# EAGLE board 4081 (EAGLE 5.06)
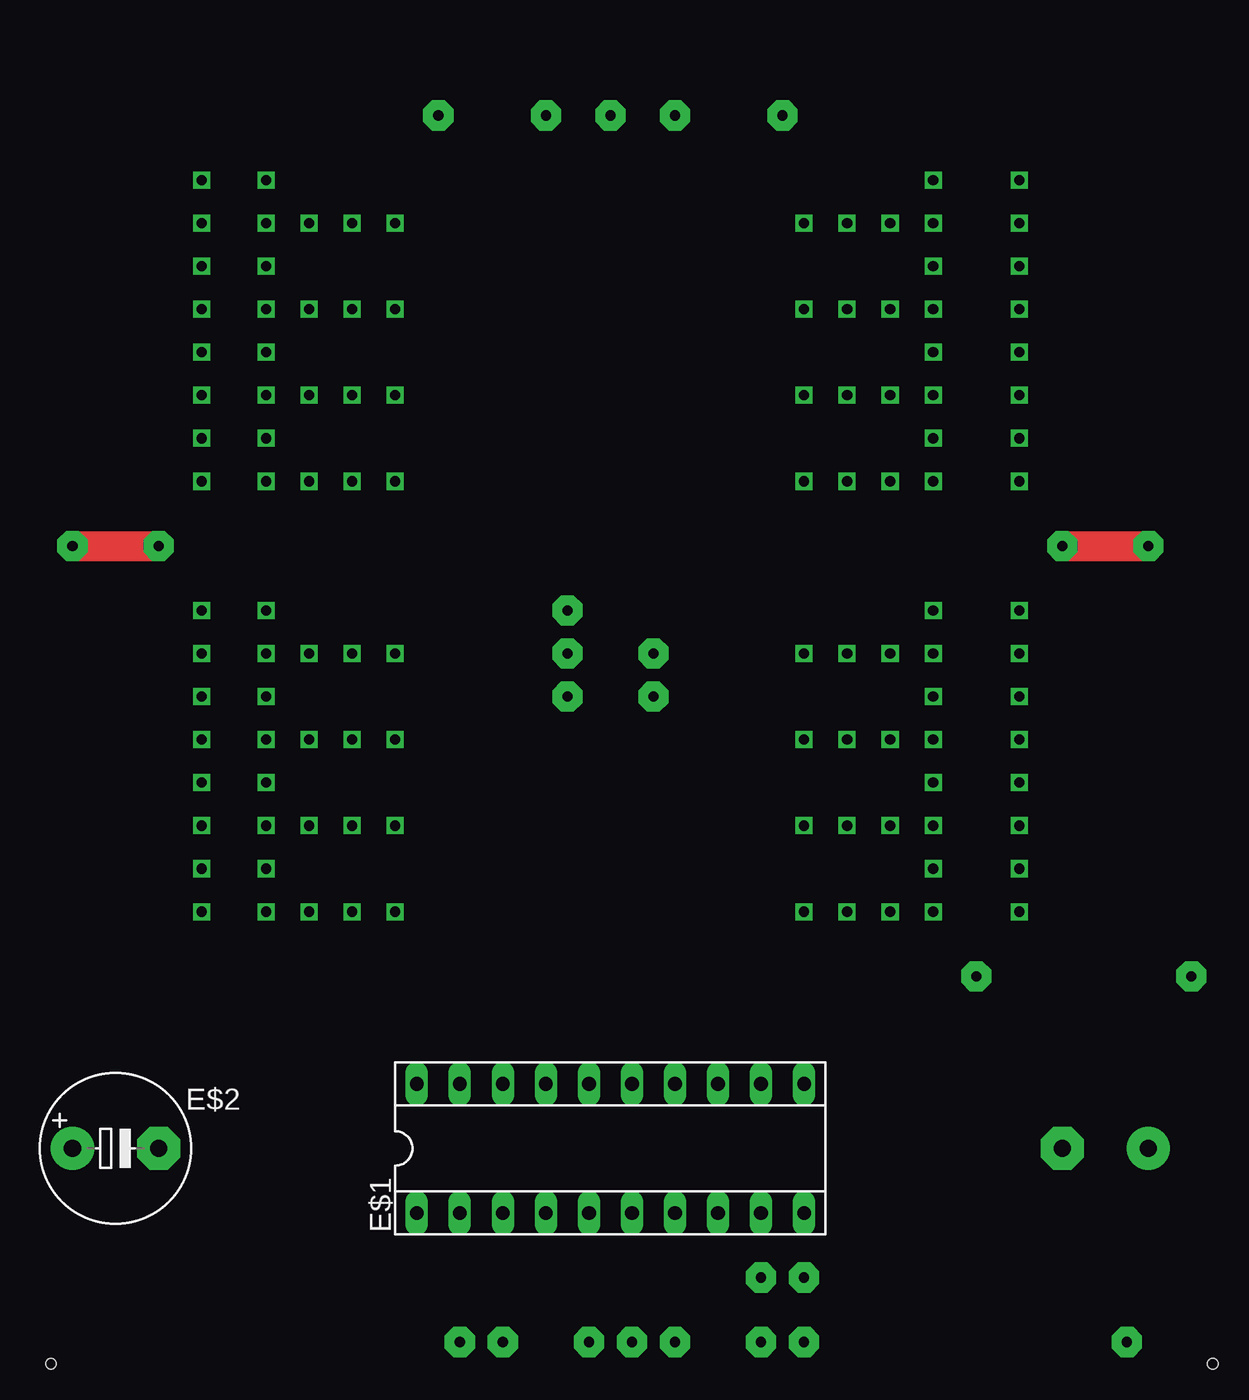
[diagram p0: board, top side]
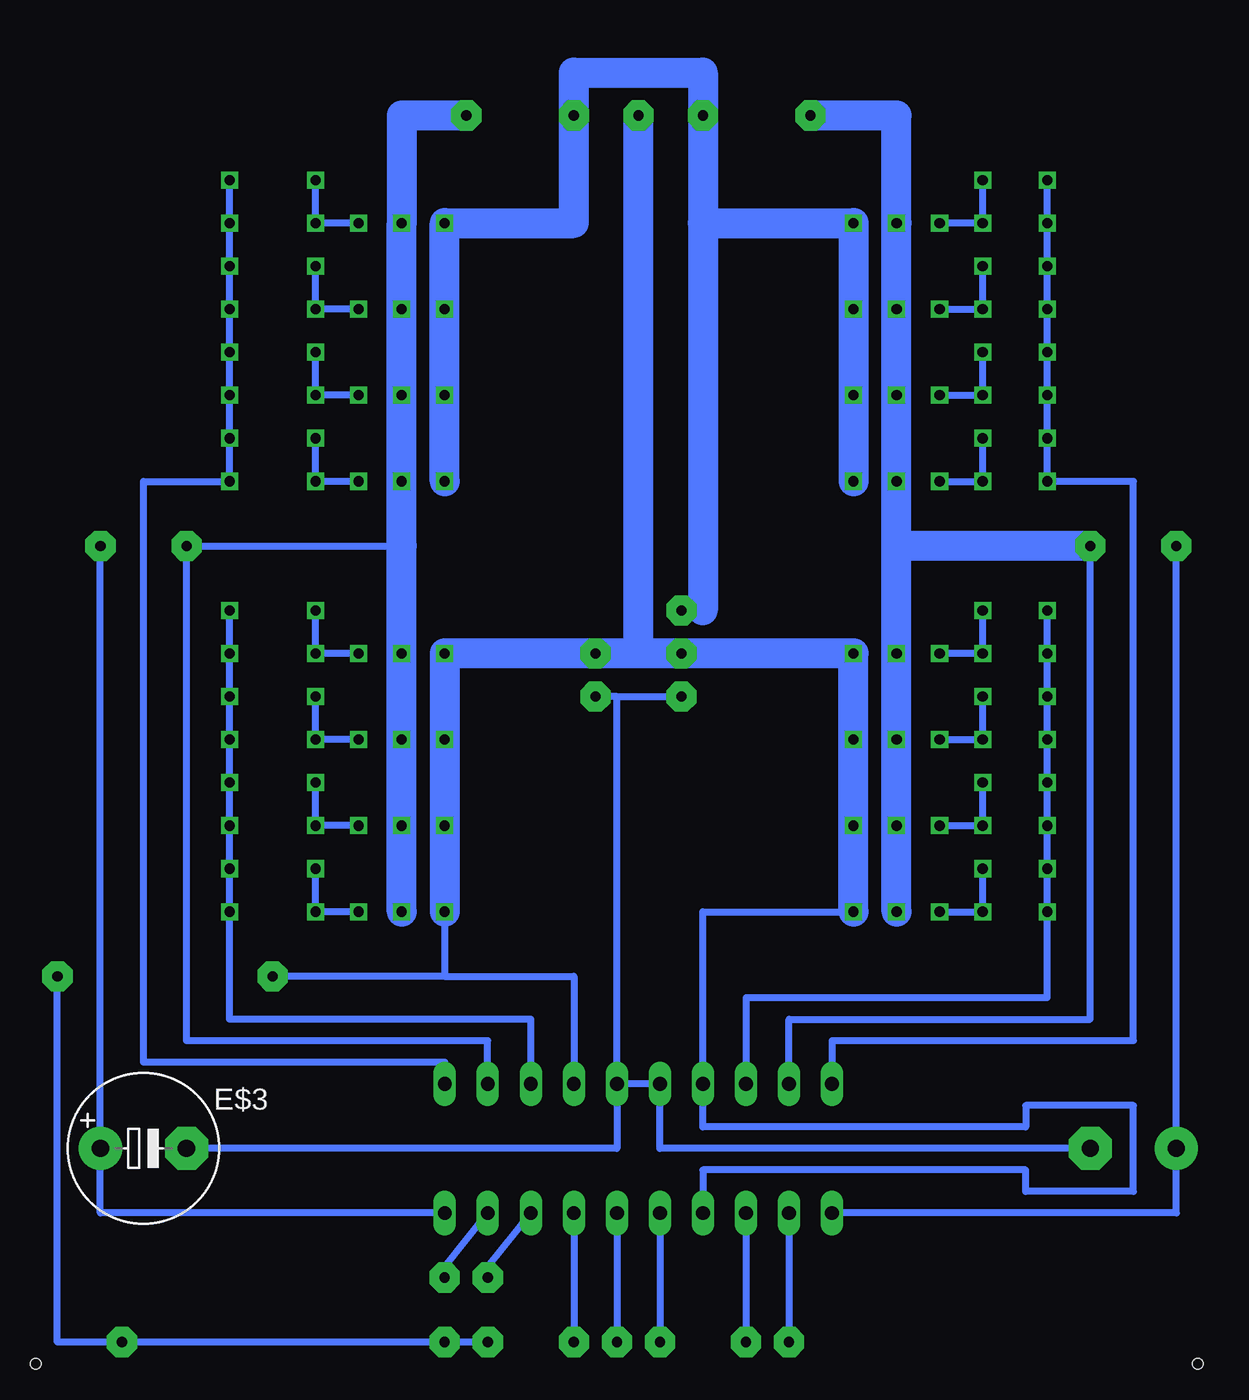
[diagram p1: board, bottom side, seen from below]

No outline drawn. Coordinates in mm, seen from the top.
Copper layers (1*16): Top 0.035mm / dielectric 1.5mm / Bottom 0.035mm
Design rules "default": minimum track width 10mil, minimum drill 24mil, track to track 8mil, track to pad 8mil, pad to pad 8mil, via to via 8mil, smd to smd 8mil, copper to edge 40mil, drill to drill 8mil, minimum pad ring 10mil, minimum via ring 8mil, stop-mask expansion 4mil, vias tented up to drill 0mil, thermal gap 10mil
Holes 0.6 mm at 0,0 68.58,0

## Footprints (pad centres in the part's own frame; a part is rotated, then mirrored left to right if it is on the bottom)
SOCKET-20 = drill 0.813 long: 1 -11.43,-3.81; 2 -8.89,-3.81; 3 -6.35,-3.81; 4 -3.81,-3.81; 5 -1.27,-3.81; 6 1.27,-3.81; 7 3.81,-3.81; 8 6.35,-3.81; 9 8.89,-3.81; 10 11.43,-3.81; 11 11.43,3.81; 12 8.89,3.81; 13 6.35,3.81; 14 3.81,3.81; 15 1.27,3.81; 16 -1.27,3.81; 17 -3.81,3.81; 18 -6.35,3.81; 19 -8.89,3.81; 20 -11.43,3.81
E5-8,5 = drill 1.016 pad 2.54 round: + -2.54,0 | drill 1.016 pad 2.54 octagon: - 2.54,0

## Placement (x,y rotation side)
E$1  [SOCKET-20]  33.02,12.7 0 top
E$2  [E5-8,5]  3.81,12.7 0 top
E$3  [E5-8,5]  62.23,12.7 0 bottom

## Library data of the parts
E$1 = ic-package
E$2 E$3 = rcl

## Nets
S$1: E$1.15 E$1.16
S$69: E$1.20
S$71: E$1.18
S$72: E$1.11
S$74: E$1.13
S$76: E$1.2
S$77: E$1.1 E$1.19
S$78: E$1.3
S$79: E$1.5
S$80: E$1.9
S$81: E$1.8
S$82: E$1.4 E$1.14 E$1.17
S$83: E$1.6
S$84: E$1.7
S$86: E$1.10 E$1.12

## Tracks (layer width: path | path; a pad name or v marks a point on that pad's centre or on a via)
S$1  (via drill 0.6 pad 1.78)
  Bottom 0.406: E$1.16 31.75,12.7 6.35,12.7 | 59.69,12.7 34.29,12.7 E$1.15 | E$1.16 E$1.15 | 34.29,39.37 v30.48,39.37 | E$1.15 34.29,39.37 | E$1.16 E$1.15 | 34.29,39.37 v35.56,39.37
S$2  (via drill 0.6)
  other vias: 17.78,41.91
S$3  (via drill 0.6)
  other vias: 8.89,26.67
S$4  (via drill 0.6)
  Bottom 0.406: v15.24,36.83 12.7,36.83 v12.7,39.37
S$5  (via drill 0.6)
  other vias: 17.78,36.83
S$6  (via drill 0.6)
  other vias: 20.32,36.83
S$7  (via drill 0.6)
  Bottom 0.406: v15.24,31.75 12.7,31.75 v12.7,34.29
S$8  (via drill 0.6)
  other vias: 17.78,31.75
S$9  (via drill 0.6)
  other vias: 20.32,31.75
S$10  (via drill 0.6)
  Bottom 0.406: v15.24,41.91 12.7,41.91 v12.7,44.45
S$11  (via drill 0.6 pad 1.78)
  Bottom 0.406: v67.31,22.86 67.31,1.27 v63.5,1.27 v44.45,1.27 v41.91,1.27
S$12  (via drill 0.6)
  other vias: 8.89,31.75
S$13  (via drill 0.6)
  Bottom 0.406: v57.15,52.07 v57.15,54.61 v57.15,59.69 v57.15,64.77 v57.15,67.31 v57.15,69.85
S$14  (via drill 0.6)
  Bottom 0.406: v8.89,41.91 v8.89,44.45
S$15  (via drill 0.6)
  other vias: 8.89,36.83
S$16  (via drill 0.6)
  Bottom 0.406: v49.53,52.07 52.07,52.07 v52.07,54.61
S$17  (via drill 0.6)
  other vias: 17.78,62.23
S$18  (via drill 0.6)
  other vias: 20.32,62.23
S$19  (via drill 0.6)
  Bottom 0.406: v15.24,57.15 12.7,57.15 v12.7,59.69
S$20  (via drill 0.6)
  other vias: 17.78,57.15
S$21  (via drill 0.6)
  other vias: 20.32,57.15
S$22  (via drill 0.6)
  other vias: 8.89,57.15
S$23  (via drill 0.6)
  other vias: 17.78,52.07
S$24  (via drill 0.6)
  Bottom 0.406: v15.24,62.23 12.7,62.23 v12.7,64.77
S$25  (via drill 0.6)
  other vias: 12.7,26.67
S$26  (via drill 0.6)
  Bottom 0.406: v49.53,31.75 52.07,31.75 v52.07,34.29
S$27  (via drill 0.6)
  Bottom 0.406: v8.89,67.31 v8.89,69.85
S$28  (via drill 0.6)
  other vias: 44.45,62.23
S$29  (via drill 0.6)
  other vias: 46.99,62.23
S$30  (via drill 0.6)
  other vias: 12.7,31.75
S$31  (via drill 0.6)
  other vias: 44.45,57.15
S$32  (via drill 0.6)
  other vias: 46.99,57.15
S$33  (via drill 0.6)
  other vias: 57.15,36.83
S$34  (via drill 0.6, 0.6 pad 1.78)
  Bottom 0.406: 29.21,44.45 v30.48,44.45
  Bottom 1.778: v44.45,52.07 v44.45,67.31 36.83,67.31 v36.83,73.66 36.83,76.2 29.21,76.2 v29.21,73.66 29.21,67.31 | v20.32,52.07 v20.32,67.31 29.21,67.31 | 29.21,67.31 29.21,44.45
S$35  (via drill 0.6)
  other vias: 46.99,52.07
S$36  (via drill 0.6)
  other vias: 12.7,36.83
S$37  (via drill 0.6)
  other vias: 8.89,62.23
S$38  (via drill 0.6)
  other vias: 46.99,41.91
S$39  (via drill 0.6)
  Bottom 0.406: v49.53,41.91 52.07,41.91 v52.07,44.45
S$40  (via drill 0.6)
  other vias: 44.45,36.83
S$41  (via drill 0.6)
  other vias: 46.99,36.83
S$42  (via drill 0.6)
  Bottom 0.406: v49.53,36.83 52.07,36.83 v52.07,39.37
S$43  (via drill 0.6)
  other vias: 44.45,31.75
S$44  (via drill 0.6)
  other vias: 46.99,31.75
S$45  (via drill 0.6)
  other vias: 57.15,31.75
S$46  (via drill 0.6)
  other vias: 44.45,26.67
S$47  (via drill 0.6)
  other vias: 12.7,41.91
S$48  (via drill 0.6)
  Bottom 0.406: v49.53,26.67 52.07,26.67 v52.07,29.21
S$49  (via drill 0.6)
  other vias: 12.7,52.07
S$50  (via drill 0.6)
  Bottom 0.406: v15.24,26.67 12.7,26.67 v12.7,29.21
S$51  (via drill 0.6)
  other vias: 12.7,57.15
S$52  (via drill 0.6)
  other vias: 12.7,62.23
S$53  (via drill 0.6)
  other vias: 52.07,41.91
S$54  (via drill 0.6)
  other vias: 12.7,67.31
S$55  (via drill 0.6)
  other vias: 52.07,36.83
S$56  (via drill 0.6)
  Bottom 0.406: v15.24,67.31 12.7,67.31 v12.7,69.85
S$57  (via drill 0.6)
  other vias: 52.07,31.75
S$58  (via drill 0.6)
  Bottom 0.406: v15.24,52.07 12.7,52.07 v12.7,54.61
S$59  (via drill 0.6)
  other vias: 52.07,26.67
S$60  (via drill 0.6)
  other vias: 57.15,57.15
S$61  (via drill 0.6)
  Bottom 0.406: v49.53,57.15 52.07,57.15 v52.07,59.69
S$62  (via drill 0.6)
  Bottom 0.406: v49.53,62.23 52.07,62.23 v52.07,64.77
S$63  (via drill 0.6)
  other vias: 57.15,62.23
S$64  (via drill 0.6)
  Bottom 0.406: v49.53,67.31 52.07,67.31 v52.07,69.85
S$65  (via drill 0.6)
  other vias: 52.07,67.31
S$66  (via drill 0.6)
  other vias: 52.07,62.23
S$67  (via drill 0.6)
  other vias: 52.07,57.15
S$68  (via drill 0.6)
  other vias: 52.07,52.07
S$69  (via drill 0.6)
  Bottom 0.406: E$1.20 21.59,19.05 3.81,19.05 3.81,52.07 v8.89,52.07 v8.89,54.61 v8.89,59.69 v8.89,64.77 8.89,67.31
S$71  (via drill 0.6)
  Bottom 0.406: E$1.18 26.67,21.59 8.89,21.59 v8.89,29.21 v8.89,34.29 v8.89,39.37 8.89,41.91
S$72
  Bottom 0.406: E$1.11 44.45,17.78 62.23,17.78 62.23,52.07 57.15,52.07
S$74  (via drill 0.6)
  Bottom 0.406: E$1.13 39.37,20.32 57.15,20.32 v57.15,26.67 v57.15,29.21 v57.15,34.29 v57.15,39.37 v57.15,41.91 v57.15,44.45
S$76  (via drill 0.6 pad 1.78)
  Bottom 0.406: E$1.2 v24.13,1.27
S$77  (via drill 0.6, 0.6 pad 1.78)
  Top 1.778: v1.27,48.26 v6.35,48.26
  Bottom 0.406: E$1.1 1.27,8.89 v1.27,48.26 | E$1.19 24.13,20.32 6.35,20.32 v6.35,48.26
  Bottom 1.778: v17.78,26.67 17.78,48.26 | 17.78,48.26 v17.78,67.31 17.78,73.66 v22.86,73.66 | v6.35,48.26 17.78,48.26
S$78  (via drill 0.6 pad 1.78)
  Bottom 0.406: E$1.3 v26.67,1.27
S$79  (via drill 0.6 pad 1.78)
  Bottom 0.406: E$1.5 v31.75,1.27
S$80  (via drill 0.6 pad 1.78)
  Bottom 0.406: v44.45,5.08 44.45,5.71 E$1.9
S$81  (via drill 0.6 pad 1.78)
  Bottom 0.406: E$1.8 41.91,5.71 v41.91,5.08
S$82  (via drill 0.6, 0.6 pad 1.78)
  Bottom 0.406: E$1.14 36.83,22.86 44.45,22.86 | 44.45,22.86 v54.61,22.86 | 44.45,26.67 44.45,22.86 | v20.32,41.91 v30.48,41.91 | v20.32,26.67 29.21,26.67 E$1.17 29.21,13.97 10.16,13.97 10.16,15.24 3.81,15.24 3.81,10.16 10.16,10.16 10.16,11.43 29.21,11.43 E$1.4
  Bottom 1.778: 44.45,26.67 v44.45,41.91 v35.56,41.91 v30.48,41.91 | v33.02,73.66 33.02,41.91 v30.48,41.91 | v30.48,41.91 v20.32,41.91 v20.32,26.67
S$83  (via drill 0.6 pad 1.78)
  Bottom 0.406: E$1.6 v34.29,1.27
S$84  (via drill 0.6 pad 1.78)
  Bottom 0.406: E$1.7 v36.83,1.27
S$86  (via drill 0.6, 0.6 pad 1.78)
  Top 1.778: v59.69,48.26 v64.77,48.26
  Bottom 0.406: E$1.12 41.91,19.05 59.69,19.05 v59.69,48.26 46.99,48.26 | E$1.10 64.77,8.89 v64.77,48.26
  Bottom 1.778: v46.99,26.67 46.99,48.26 v46.99,67.31 46.99,73.66 v43.18,73.66